# Altium PCB PCB_BUCK_OFFICIAL.PcbDoc
Units mil, origin at the board's own origin, x right, y up, seen from the top; angles counter-clockwise.
Board outline 6000 x 4000 mil, 2 copper layers (Top Layer, Bottom Layer); 43 components, 23 nets, 128 pads, 0 vias.
Unrouted connection lines stored in the file: 78.
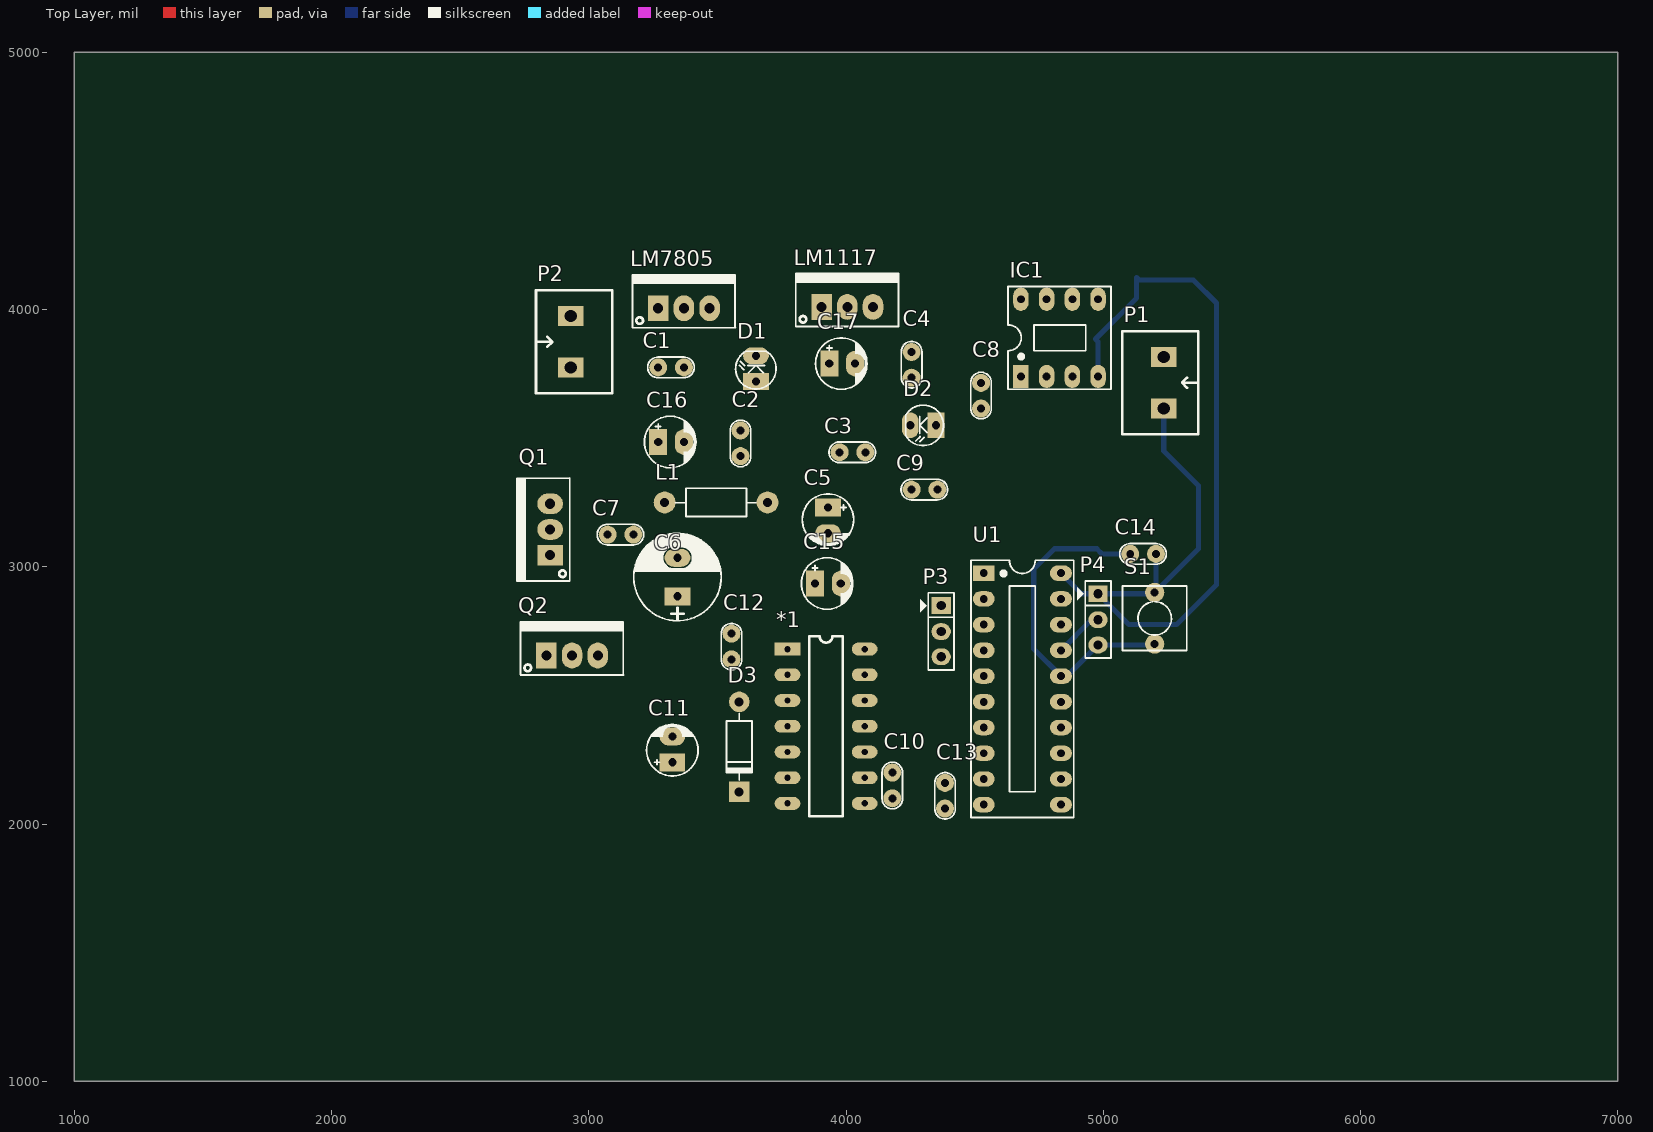
[diagram p0: Top Layer view]
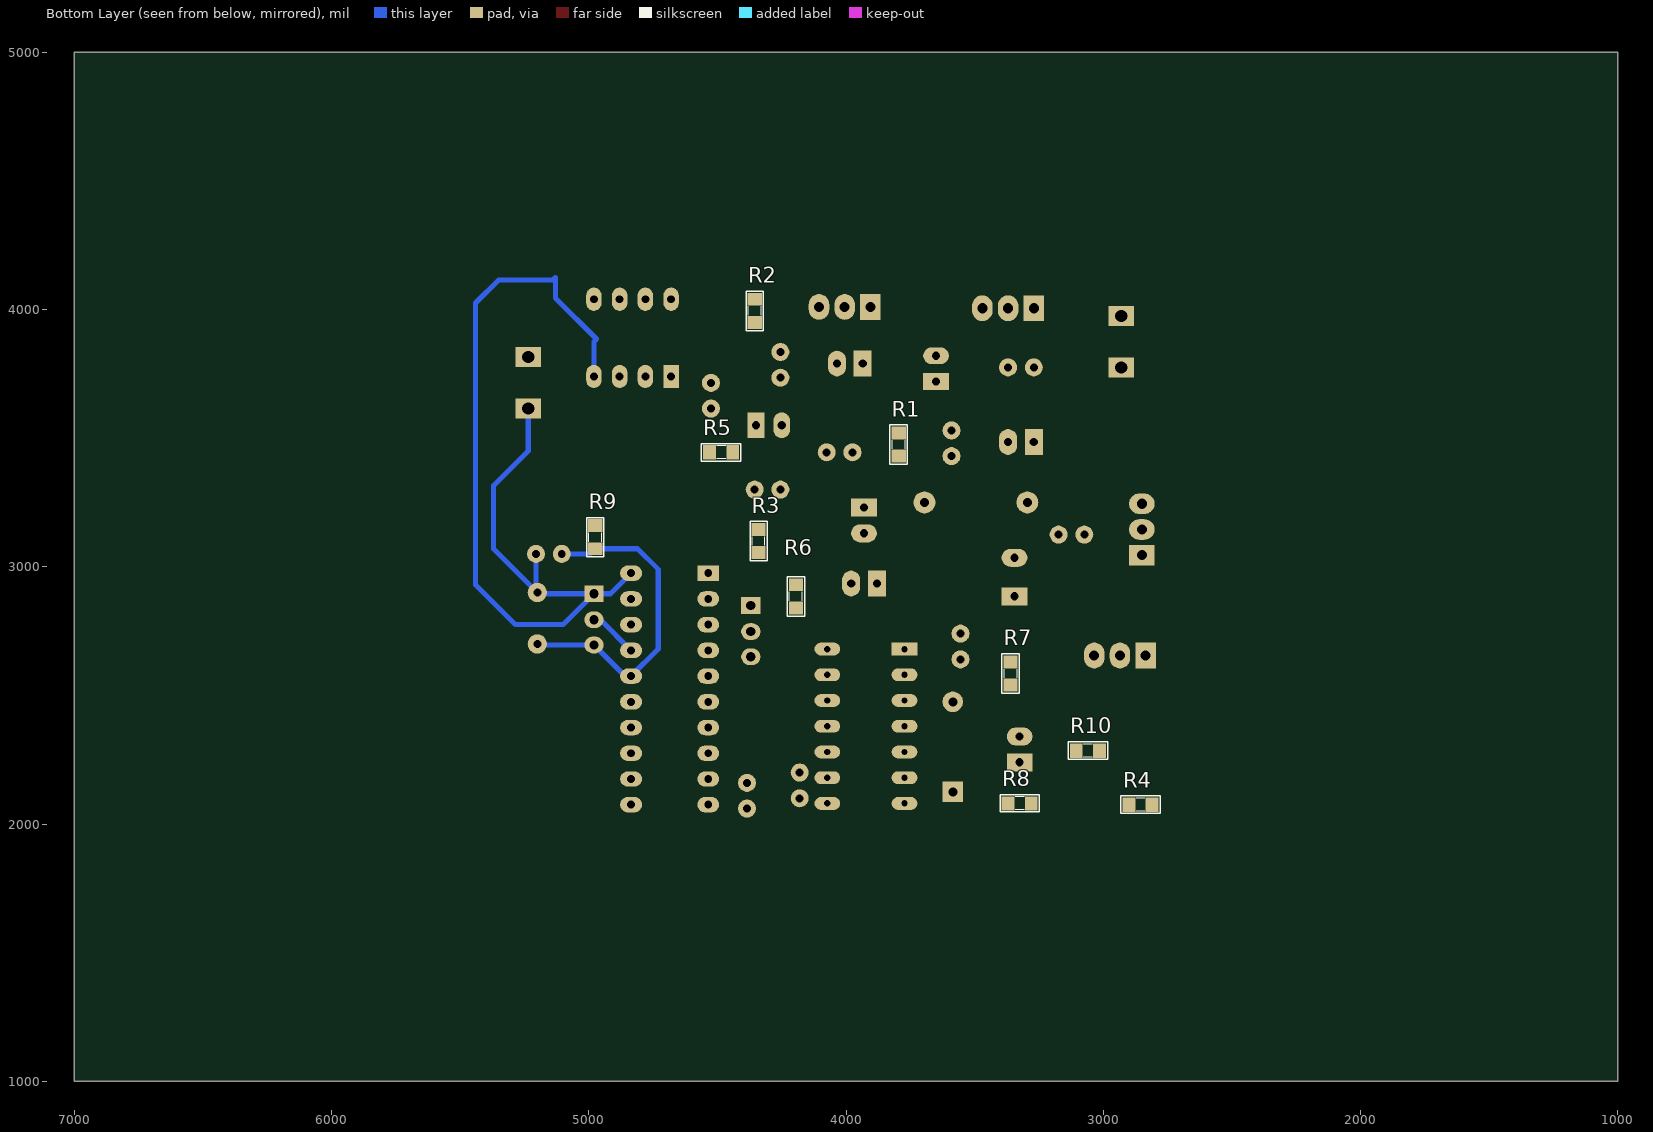
[diagram p1: Bottom Layer view, seen from below]

## Layer stack, top to bottom
Top Solder: solder mask 0.4, Solder Resist, Dk 3.5
Top Layer: signal copper 1.4
Dielectric 1: dielectric 12.6, FR-4, Dk 4.8
Bottom Layer: signal copper 1.4
Bottom Solder: solder mask 0.4, Solder Resist, Dk 3.5

## Board outline
1000,1000 7000,1000 7000,5000 1000,5000

## Design rules (kind name [scope] priority, off if disabled: settings)
Clearance [All] p1: gap=10 ignorepadtopadclearanceinfootprint=FALSE except(20: Arc-Arc Arc-Track Arc-Text Arc-Hole Track-Track Track-Text Track-Hole SMDPad-Text SMDPad-Hole THPad-Text THPad-Hole Via-Text Via-Hole Fill-Text Fill-Hole Poly-Text Poly-Hole Region-Text Region-Hole Text-Text Text-Hole)
PolygonConnect [All] p1: connectstyle=Relief reliefconductorwidth=10 reliefentries=4 polygonreliefangle="90 Angle" airgapwidth=10
RoutingVias [All] p1: holewidth=28 width=50 viastyle="Through Hole" minholewidth=28 minwidth=50 maxholewidth=28 maxwidth=50
SolderMaskExpansion [All] p1: expansion=4
Width [All] p1: maxlimit=100 minlimit=20 preferedwidth=20
30 further rules are at their usual default settings.

## Components (designator, comment, footprint, x,y, rotation, side; value= is the part's Value field where it differs from the comment)
*1 "IR2110" IR_2110_2 3772.49,2680 r0 top
C1 "Cap Non-Pol" CN1 3370,3775 r180 top value=0.1uF
C2 "Cap Non-Pol" CN1 3590,3530 r270 top value=0.1uF
C3 "Cap Non-Pol" CN1 4075,3445 r180 top value=0.1uF
C4 "Cap Non-Pol" CN1 4255,3735 r90 top value=0.1uF
C5 "Cap Pol" CP1/2 3930,3230 r270 top value=470uF/25V
C6 "Cap Pol" CP1.5/3.4 3345,2885 r90 top value=470uF/50V
C7 "Cap Non-Pol" CN1 3173.56,3125 r180 top value=100nF
C8 "Cap Non-Pol" CN1 4525,3615 r90 top value=10nF
C9 "Cap Non-Pol" CN1 4355,3300 r180 top value=10nF
C10 "Cap Non-Pol" CN1 4180,2200 r270 top value=100nF
C11 "Cap Pol" CP1/2 3325,2240 r90 top value=1uF
C12 "Cap Non-Pol" CN1 3555,2740 r270 top value=100nF
C13 "Cap Non-Pol" CN1 4385,2160 r270 top value=100nF
C14 "Cap Non-Pol" CN1 5205,3050 r180 top value=1nF
C15 "Cap Pol" CP1/2 3880,2935 r0 top value=10uF
C16 "Cap Pol" CP1/2 3270,3485 r0 top value=470uF/25V
C17 "Cap Pol" CP1/2 3935,3790 r0 top value=470uF/25V
D1 "LED" LED-3mm 3650,3720 r90 top
D2 "LED" LED-3mm 4350,3550 r180 top
D3 "Diode" D1A 3585,2475 r90 top
IC1 "LM358" DIP8/W0.3 4680,3740 r0 top
L1 "Inductor Iron" R1/2W 3295,3250 r0 top value=470uH
LM1117 "LM7805" QTO-220 3905,4010 r0 top
LM7805 "LM7805" QTO-220 3270,4005 r0 top
P1 "Domino 2" "DOMINO 2- 5mm" 5235,3715 r270 top
P2 "Domino 2" "DOMINO 2- 5mm" 2930,3875 r90 top
P3 "Header 3" JP3 4370,2749 r270 top
P4 "Header 3" JP3 4980,2795 r270 top
Q1 "IRF3205" QTO-220 2850,3045 r90 top value=IRF840
Q2 "IRF3205" QTO-220 2835,2655 r0 top value=IRF840
R1 "Resistor 1/4W" RES-SM-0805 3795,3520 r270 bottom value=220
R2 "Resistor 1/4W" RES-SM-0805 4355,3950 r90 bottom value=100
R3 "Resistor 1/4W" RES-SM-0805 4340,3055 r90 bottom value=2.2K
R4 "Resistor 1/4W" RES-SM-0805 2810,2075 r0 bottom value=1K
R5 "Resistor 1/4W" RES-SM-0805 4530,3445 r180 bottom value=27
R6 "Resistor 1/4W" RES-SM-0805 4195,2840 r90 bottom value=1K
R7 "Resistor 1/4W" RES-SM-0805 3360,2630 r270 bottom value=1K
R8 "Resistor 1/4W" RES-SM-0805 3280,2080 r0 bottom value=10
R9 "Resistor 1/4W" RES-SM-0805 4975,3070 r90 bottom value=47K
R10 "Resistor 1/4W" RES-SM-0805 3015,2285 r0 bottom value=10
S1 "Tact SW - 2Pin" SW2 5200,2700 r90 top
U1 "MSP430G2553" DIP20/W0.3 4535.49,2975 r270 top

## Footprints (in the part's own frame and the unit in brackets; to place one, negate y for a bottom-side part, rotate by r counter-clockwise, add the part's x,y. Pads: shape width x height; smd on the part's side, far side on the other; paste and mask are expansions set on the pad)
CN1 [mil]
  round 70 hole 31: 1(0,0) 2(100,0)
  silkscreen extent -40,-40 141,40, body extent -60,-30 170,37, height 265
CP1.5/3.4 [mil] "Tu hoa 220->470uF,16V, 470uF/16V,25V"
  rect 70x100 hole 32: 1(0,0)
  oval 70x100 hole 32: 2(150,0)
  silkscreen extent -95,-170 245,170, body extent -85,-157 230,157, height 446
CP1/2 [mil] "Tu hoa < 22uF/16>50V"
  rect 70x100 hole 32: 1(0,0)
  oval 70x100 hole 32: 2(100,0)
  silkscreen extent -53,-100 146,100, body extent -49,-99 149,99, height 287
D1A [mil] "Diode 1N4007, W 100mil, L 350mil"
  round 80 hole 35: 1(0,0)
  rect 80x80 hole 35: 2(-350,0)
  silkscreen extent -305,-50 -45,50, body extent -386,-33 34,36, height 84
DIP8/W0.3 [mil] "8 PIN, W 300mil, Pin to pin 100mil"
  rect 60x90 hole 31: 1(0,0)
  oval 60x90 hole 31: 2(100,0) 3(200,0) 4(300,0) 5(300,300) 6(200,300) 7(100,300) 8(0,300)
  silkscreen extent -50,-50 350,350, body extent -50,-40 350,336, height 201
DIP20/W0.3 [mil] "DIP 20, 20 PIN, W 300mil, Pin to pin 100mil"
  rect 60x85 hole 31: 1(0,0)
  oval 60x85 hole 31: 2(100,0) 3(200,0) 4(300,0) 5(400,0) 6(500,0) 7(600,0) 8(700,0) 9(800,0) 10(900,0) 11(900,300) 12(800,300) 13(700,300) 14(600,300) 15(500,300) 16(400,300) 17(300,300) 18(200,300) 19(100,300) 20(0,300)
  silkscreen extent -50,-50 950,350, body extent -91,-18 945,322, height 155
"DOMINO 2- 5mm" [mm]
  rect 2x2.5 hole 1.2: 1(-2.54,0) 2(2.54,0)
  silkscreen extent -5.08,-4.08 5.08,3.43, body extent -5,-4.07 5,3.43, height 10
IR_2110_2 [mil]
  rect 100x50 hole 25: 1(0,0)
  oval 100x50 hole 25: 2(0,-100) 3(0,-200) 4(0,-300) 5(0,-400) 6(0,-500) 7(0,-600) 8(300,-600) 9(300,-500) 10(300,-400) 11(300,-300) 12(300,-200) 13(300,-100) 14(300,0)
  silkscreen extent 85,-650 215,50
JP3 [mil] "Jumper 3"
  rect 65x75 hole 36: 1(-100,0)
  oval 65x75 hole 36: 2(1,0) 3(99,0)
  silkscreen extent -150,-81 150,50, body extent -150,-60 150,55, height 355
LED-3mm [mil] "LED 2 PIN, 3ly Only colour"
  rect 65x100 hole 32: 1(0,0)
  oval 65x100 hole 32: 2(100,0)
  silkscreen extent -29,-78 118,79, body extent -25,-75 113,75, height 217
QTO-220 [mil] "TO-220 - 1-2-3"
  rect 80x100 hole 39: 1(0,0)
  oval 80x100 hole 39: 2(100,0) 3(200,0)
  silkscreen extent -100,-76 300,130, body extent -119,-64 322,121, height 755
R1/2W [mil] "R 1/2W, 2 pin, 300mil"
  round 85 hole 35: 1(0,0) 2(400,0)
  silkscreen extent 42,-55 356,55, body extent -12,-45 414,49, height 91
RES-SM-0805 [mil]
  rect 50x55 smd: 1(0,0) 2(90,0)
  silkscreen extent -32,-34 121,33, body extent 6,-25 84,25, height 31
SW2 [mil] "SW button 2pin, 250x 250 mil"
  round 75 hole 31: 1(0,0) 2(200,0)
  silkscreen extent -25,-125 225,125

## Part data
C1 C2 C3 C4 C7 C8 C9 C10 C12 C13 C14: "Capacitor"
C5 C6 C11 C15 C16 C17: "Polarized Capacitor (Radial)"
D3: "Default Diode"
IC1: "Low-Power Dual Operational Amplifier"
L1: "Magnetic-Core Inductor", Manufacturer="Generic Components", Class=Passive, Published=1999, SubClass=Inductor
LM1117 LM7805: "Positive Voltage Regulator"
P1 P2: "Domino, 2-Pin", LatestRevisionDate=17-Jul-2002, LatestRevisionNote="Re-released for DXP Platform.", Publisher="Altium Limited"
P3 P4: "Header, 3-Pin", LatestRevisionDate=17-Jul-2002, LatestRevisionNote="Re-released for DXP Platform.", Publisher="Altium Limited"
Q1 Q2: library part IRF840, "MOSFET N - CHANNEL 500V - 0.75 - 8A - TO-220"
R1 R2 R3 R4 R5 R6 R7 R8 R9 R10: library part RES
S1: "Switch button 2 pin"

## Nets (pads, with @x,y where several pads share a name; then routed paths per layer and width w, separated by ;. In a path a pad name is that pad's centre, name@x,y a point inside that pad or via, vN(x,y) a via of type N, cw(c..) or ccw(c..) an arc to the next point about the centre after c; other vN are vias at no path point)
3v3: *1.9 C4.2 C10.2 C13.2 IC1.8 LM1117.3 R2.2 R9.2 U1.1
ADC_IN: C9.1 R5.2 U1.7
G1: Q1.1 R4.1 R8.1
G2: Q2.1 R7.2 R10.1
Net*1_1: *1.1 R10.2
Net*1_6: *1.6 C11.1 D3.2
Net*1_7: *1.7 R8.2
NetC2_2: C2.2 C3.2 C17.1 LM1117.1 LM7805.3 R1.2
NetC8_2: C8.2 IC1.3
NetD1_1: D1.1 R1.1
NetD2_1: D2.1 R2.1
NetIC1_1: IC1.1 IC1.2 R5.1
NetR3_1: R3.1 R6.2
PWM_H: *1.10 U1.12
PWM_L: *1.12 U1.9
RESET: C14.2 P4.3 R9.1 S1.1 U1.16 | length 1291.4
  Bottom Layer w20: C14.2 4995,3050 R9.1 4810,3070 4730,2990 4730,2680.49 U1.16 4859,2575 P4.3 5196,2696 S1.1
RXD: P3.2 U1.4
S1: *1.5 C11.2 L1.1 Q1.3 Q2.2 R4.2
S2: *1.2 *1.11 *1.13 C1.1 C2.1 C3.1 C4.1 C5.2 C6.2 C7.1 C8.1 C9.2 C10.1 C12.1 C13.1 C14.1 C15.2 C16.2 C17.2 D1.2 D2.2 IC1.4 LM1117.2 LM7805.2 P1.2 P2.2 P3.3 P4.1 Q2.3 R6.1 R7.1 S1.2 U1.20 | length 3861.8
  Bottom Layer w20: U1.20 4915.49,2895 P4.1 ; IC1.4 4980,3875 4970,3885 5130,4045 5130,4125 5140,4115 5350,4115 5440,4025 5440,2930 5285,2775 5100,2775 P4.1 ; C14.1 S1.2@5205,2905 ; P1.2 5235,3450 5370,3315 5370,3070 S1.2@5205,2905 ; P4.1 5195,2895 S1.2 S1.2@5205,2905
TEST: P4.2 U1.17 | length 193.8
  Bottom Layer w20: U1.17 4954.49,2794 P4.2
TXD: P3.1 U1.3
Vin: *1.3 C1.2 C6.1 C7.2 C12.2 C15.1 C16.1 D3.1 LM7805.1 P2.1 Q1.2
Vout: C5.1 L1.2 P1.1 R3.2
pads on no net: *1.4 *1.8 *1.14 IC1.5 IC1.6 IC1.7 U1.2 U1.5 U1.6 U1.8 U1.10 U1.11 U1.13 U1.14 U1.15 U1.18 U1.19